# Altium PCB PCB1.PcbDoc
Units mm, origin at the board's own origin, x right, y up, seen from the top; angles counter-clockwise.
Board outline 50.01 x 50 mm, 2 copper layers (Top Layer, Bottom Layer); 45 components, 45 nets, 223 pads, 70 vias.
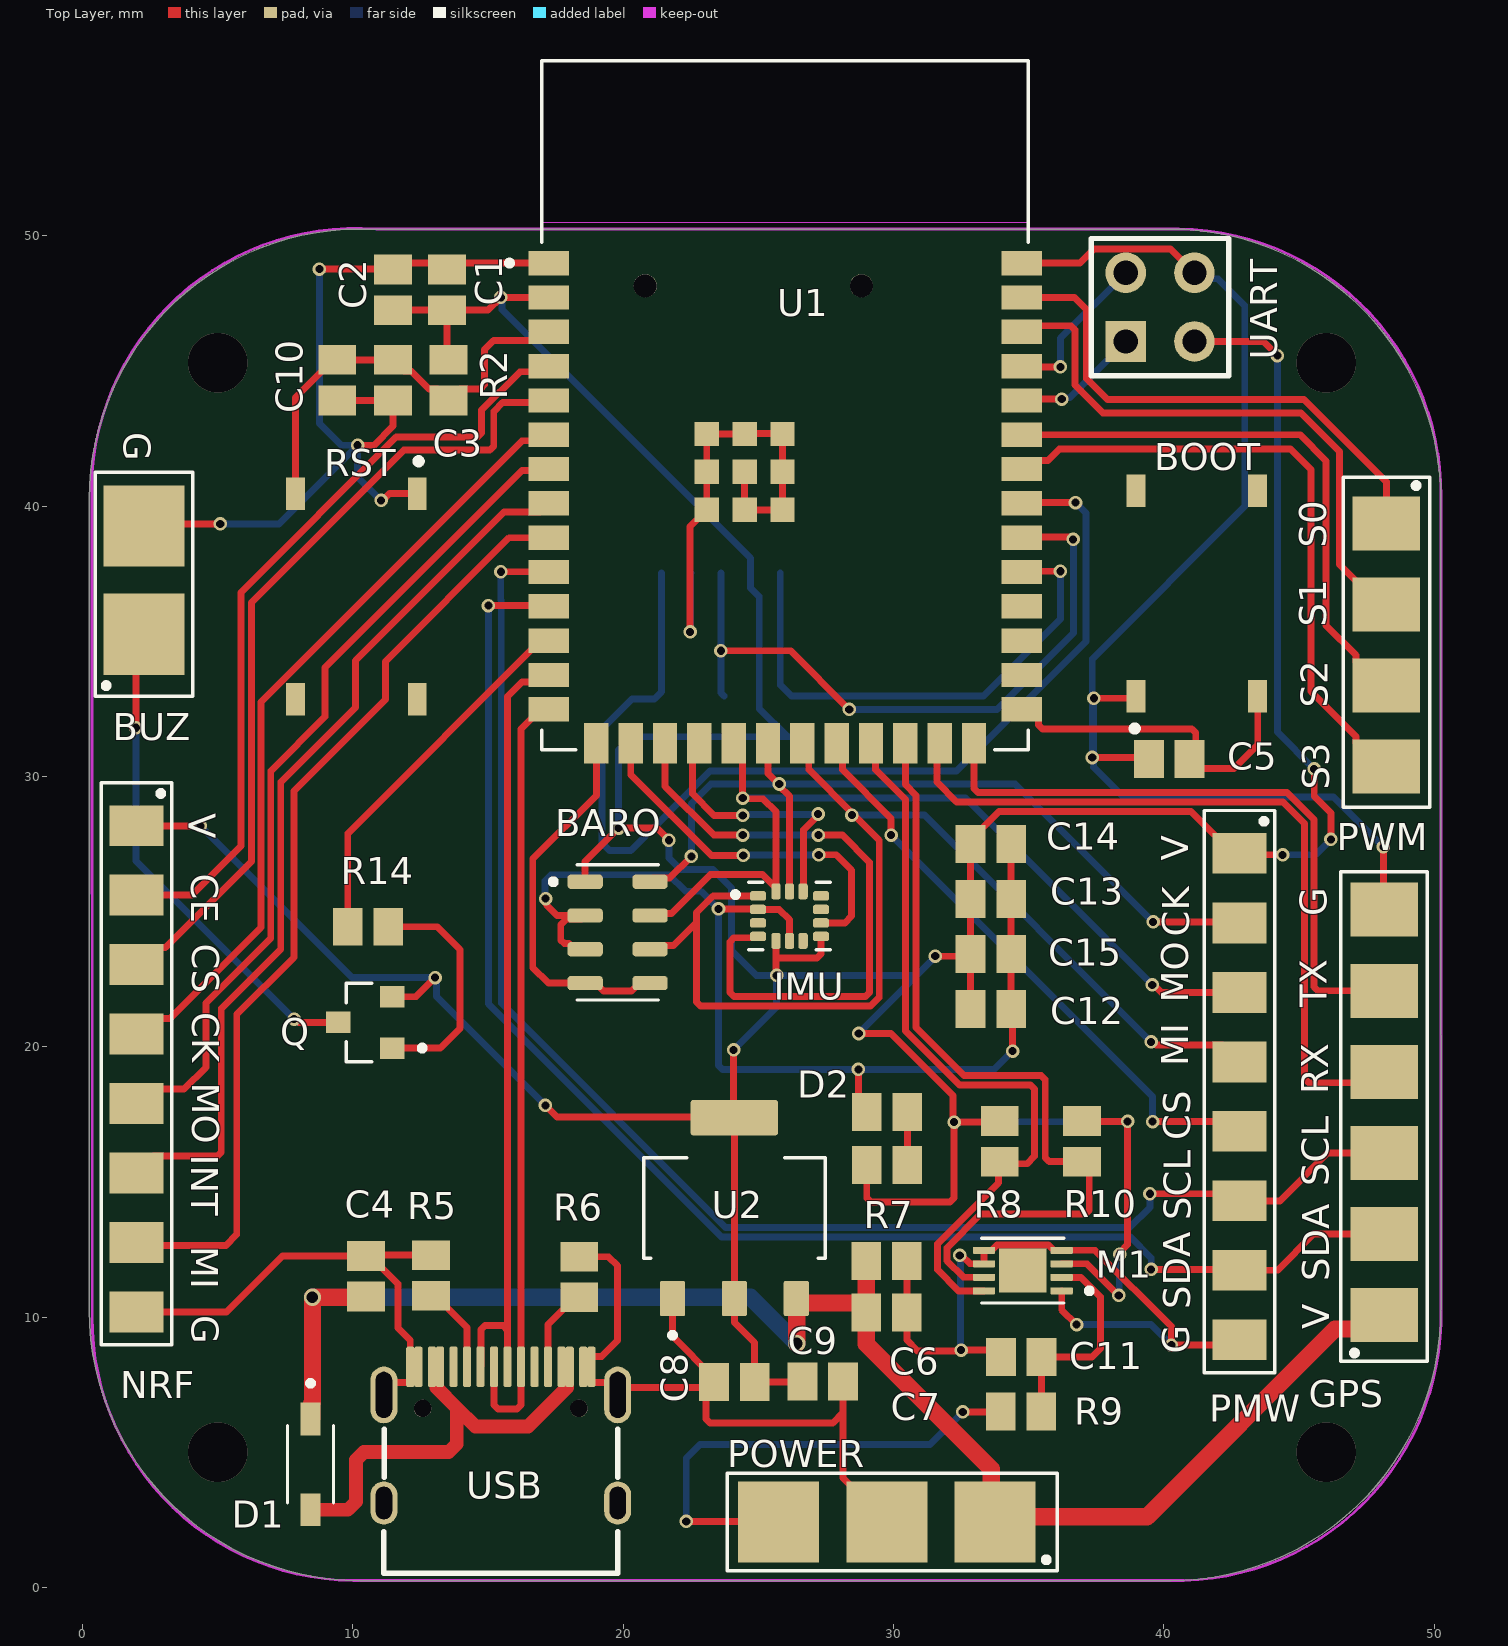
[diagram p0: Top Layer view]
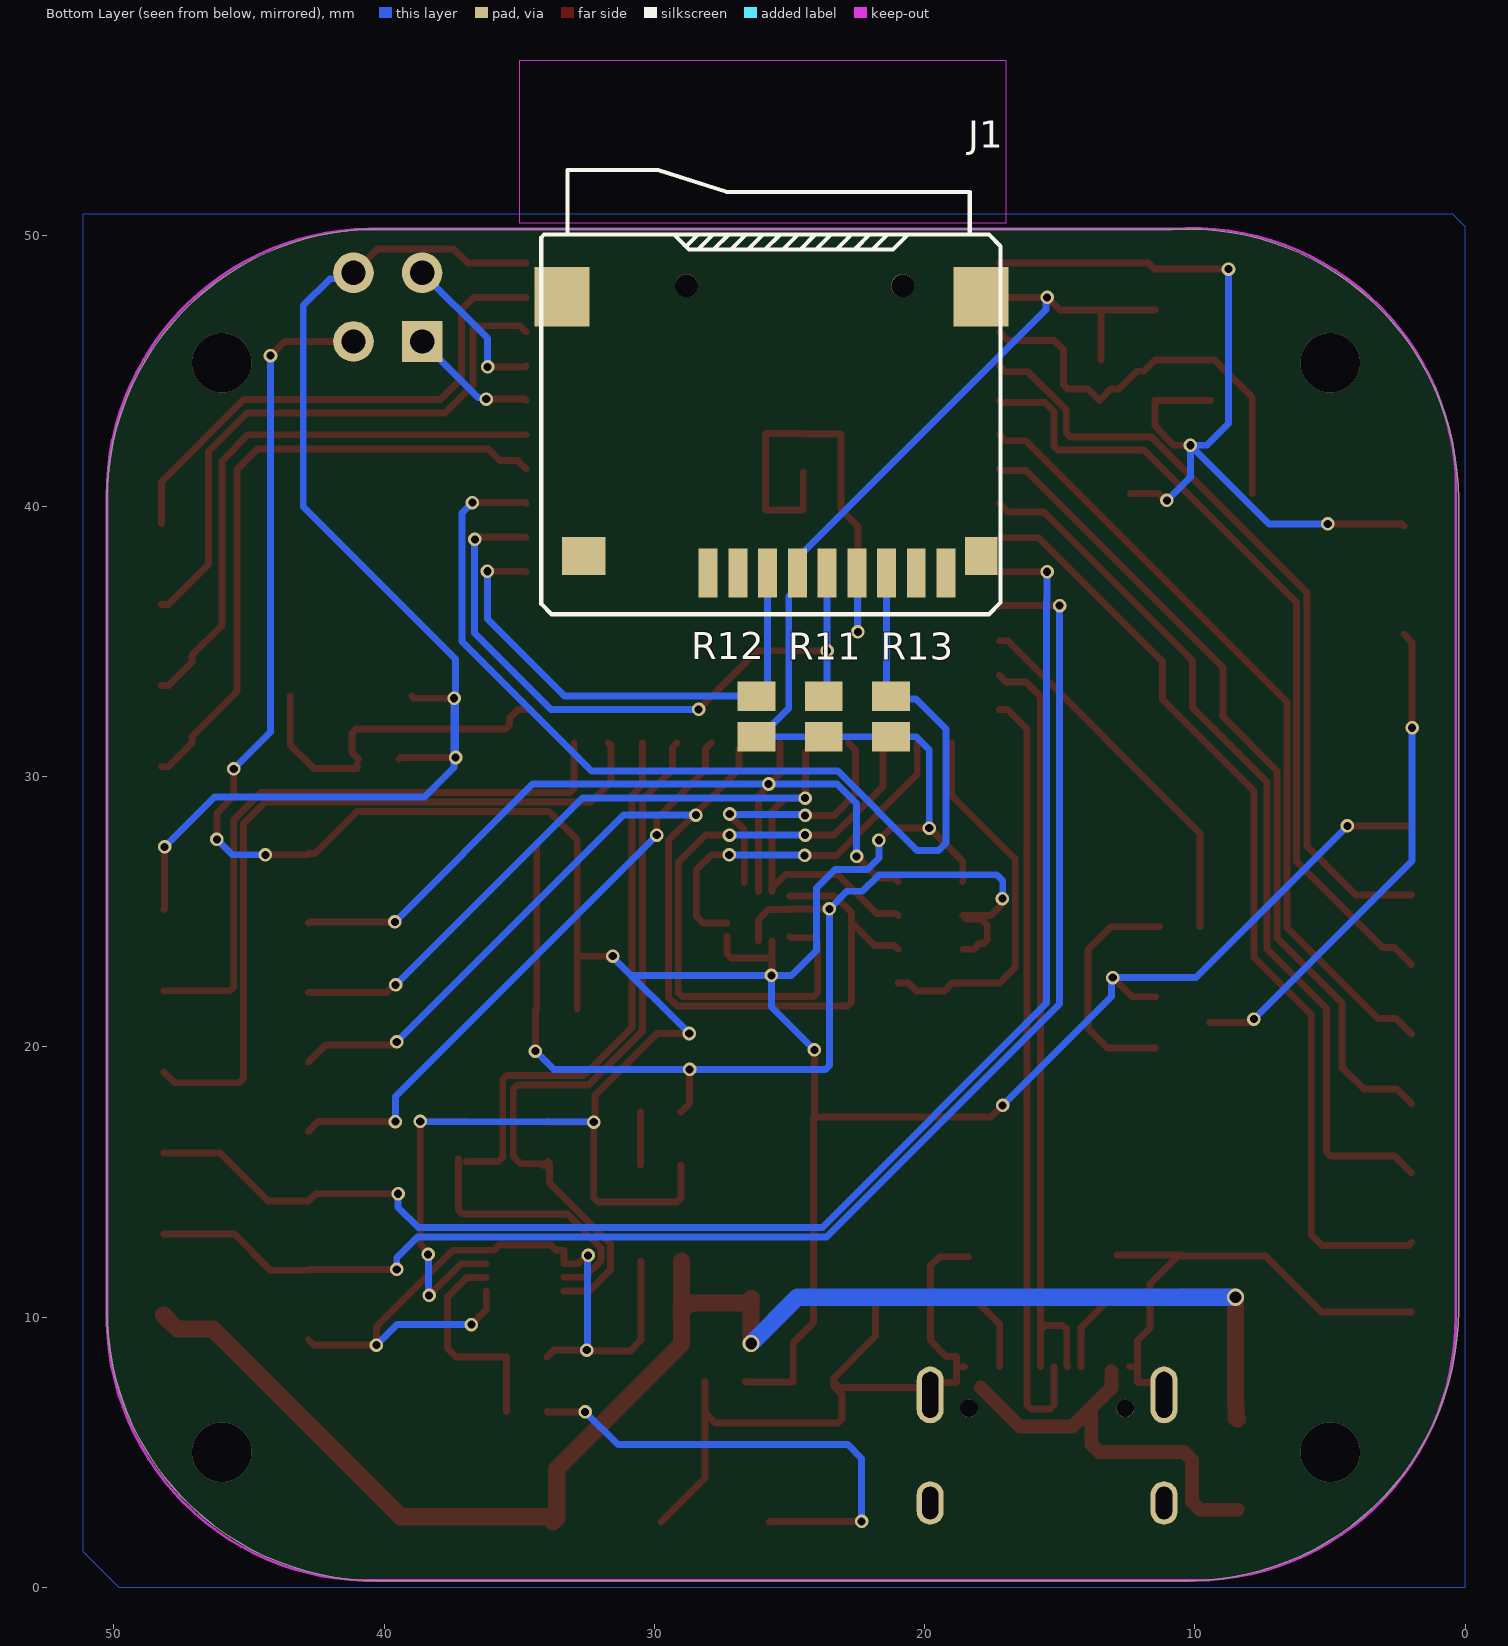
[diagram p1: Bottom Layer view, seen from below]

## Layer stack, top to bottom
Top Solder: solder mask 0.0102, Solder Resist, Dk 3.5
Top Layer: signal copper 0.0356
Dielectric 1: dielectric 0.32, FR-4, Dk 4.8
Bottom Layer: signal copper 0.0356
Bottom Solder: solder mask 0.0102, Solder Resist, Dk 3.5

## Board outline
0.25,10.25 0.25,40.25 cw(c10.25,40.25) 10.25,50.25 40.25,50.25 cw(c40.25,40.25) 50.25,40.25 50.25,20.44 50.26,20.44 50.26,10.252 50.25,10.25 cw(c40.25,10.25) 40.25,0.25 10.25,0.25 cw(c10.25,10.25)

## Design rules (kind name [scope] priority, off if disabled: settings)
Clearance [All] p1: gap=0.1 ignorepadtopadclearanceinfootprint=FALSE except(0.01: Arc-SMDPad Arc-THPad Arc-Hole Track-SMDPad Track-THPad Track-Hole SMDPad-SMDPad SMDPad-THPad)
DiffPairsRouting [All] p1: maxlimit=0.4 minlimit=0.3 mostfreqgap=0.3 toplayer_minwidth=0.381 toplayer_maxwidth=0.381 toplayer_prefwidth=0.381 bottomlayer_minwidth=0.381 bottomlayer_maxwidth=0.381 bottomlayer_prefwidth=0.381 maxuncoupledlength=12.7
MinimumSolderMaskSliver [All] p1: minsoldermaskwidth=0.01
PlaneConnect [All] p1: planeconnectstyle=Relief reliefexpansion=0.508 reliefentries=4 reliefconductorwidth=0.5 reliefairgap=0.5
PolygonConnect [All] p1: connectstyle=Relief reliefconductorwidth=0.5 reliefentries=4 polygonreliefangle="90 Angle" airgapwidth=0.5
RoutingVias [All] p1: holewidth=0.3 width=0.5 viastyle="Through Hole" minholewidth=0.3 minwidth=0.5 maxholewidth=10 maxwidth=0.5
SilkToSilkClearance [All] p1: silktosilkclearance=0
SilkToSolderMaskClearance [IsPad] p1: minsilkscreentomaskgap=0 clearancetoexposedcopper=TRUE
SolderMaskExpansion [IsVia] p1: expansion=0.102 istentingtop=TRUE
Width [All] p1: maxlimit=0.762 minlimit=0.254 preferedwidth=0.254 minimp=50.000000 maximp=50.000000 favimp=50.000000
25 further rules are at their usual default settings.

## Classes and differential pairs
component class Sheet2: AAAA BARO BUZ C12 C13 C14 C15 GPS IMU NRF PMW PWM Q R14 UART
component class Sheet1: AAAA BOOT C1 C2 C3 C4 C5 C6 C7 C8 C9 C10 C11 D1 D2 J1 M1 POWER R2 R5 R6 R7 R8 R9 R10 R11 R12 R13 RST U1 U2 USB

## Components (designator, comment, footprint, x,y, rotation, side; value= is the part's Value field where it differs from the comment)
BARO "MS5611-01BA03" MS5611-SON125P500X300X100-8N 19.79,24.23 r0 top
BOOT "SWITCH6*6*5" SWITCH6*6*5 41.22,36.77 r90 top
BUZ "Buzzer" POWER-2P 2.27,39.26 r90 top
C1 "10uF/25v(20%)" C0805 13.48,48 r270 top
C2 "0.1uF/50V(10%)" C0805 11.48,48 r270 top
C3 "0.1uF/50V(10%)" C0805 11.48,44.66 r90 top value=1uF/16V(10%)
C4 "10uF/25V(20%)" C0805 10.48,11.51 r270 top
C5 "0.1uF/16V(10%)" C0805 40.2,30.65 r0 top
C6 "10uF/25V(20%)" C0805 29.74,12.07 r180 top
C7 "0.1uF/16V(10%)" C0805 29.74,10.17 r180 top
C8 "10uF/25V(20%)" C0805 24.11,7.6 r0 top
C9 "0.1uF/16V(10%)" C0805 27.38,7.62 r180 top
C10 "0.1uF/16V(10%)" C0805 9.42,44.66 r90 top
C11 "1uF/16V(10%)" C0805 34.72,8.52 r180 top
C12 "0.1uF/50V(10%)" C0805 33.6,21.39 r0 top value=10nF
C13 "10uF/25v(20%)" C0805 33.6,25.463 r180 top value=2.2uF
C14 "0.1uF/50V(10%)" C0805 33.6,27.5 r0 top value=0.1uF
C15 "0.1uF/50V(10%)" C0805 33.6,23.427 r0 top value=0.1uF
D1 "1N5819HW-7" SOD3715X145N 8.43,4.55 r270 top
D2 "LED0" C0805 29.76,17.58 r180 top
GPS "Header 6" SIGNAL-6P 48.15,19.07 r90 top
IMU "ICM-42688-P" ICM42688-PQFN50P300X250X97-14N 26.15,24.83 r0 top
J1 "Micro SD" "MICRO SD" 17.91,47.75 r0 bottom
M1 "MAX17040G" MAX17040G+T 34.78,11.72 r180 top
NRF "Header 8" SIGNAL-8P 1.99,20.47 r270 top
PMW "Header 8" SIGNAL-8P 42.8,19.44 r270 top
POWER "Header 3" POWER-3P 29.75,2.42 r180 top
PWM "Header 4" SIGNAL-4P 48.23,30.36 r270 top
Q "S8550" SOT-23_S8550 10.46,20.9 r180 top
R2 "10k(1%)" C0805 13.54,44.66 r90 top
R5 "5.1K" C0805 12.89,11.54 r270 top
R6 "5.1K" C0805 18.37,11.48 r270 top
R7 "5.1K" C0805 29.76,15.63 r0 top
R8 "4.7K(1%)" C0805 33.93,16.5 r90 top
R9 "1K" C0805 34.71,6.5 r0 top
R10 "4.7K(1%)" C0805 36.97,16.5 r90 top
R11 "10k(1%)" C0805 23.735,32.22 r270 bottom
R12 "10k(1%)" C0805 26.22,32.22 r270 bottom
R13 "10k(1%)" C0805 21.25,32.22 r270 bottom
R14 "1K" C0805 10.56,24.44 r0 top
RST "SWITCH6*6*5" SWITCH6*6*5 10.13,36.66 r270 top
U1 "ESP32-S3-WROOM-1" ESP32-S3-WROOM-1-N16R8 25.99,43.73 r0 top
U2 "AMS1117" SOT229P700X180-4N 24.11,14.03 r90 top
UART "Header 4" HDR2X2 38.59,46.09 r0 top
USB "Type-C" TYPE-C-TOP 15.47,5.64 r270 top

## Footprints (in the part's own frame and the unit in brackets; to place one, negate y for a bottom-side part, rotate by r counter-clockwise, add the part's x,y. Pads: shape width x height; smd on the part's side, far side on the other; paste and mask are expansions set on the pad)
C0805 [mm] "Chip Capacitor, Body 2.0x1.3mm, IPC High Density"
  rect 1.1x1.4 smd: 1(-0.75,0) 2(0.75,0)
  body extent -1.1,-0.72 1.1,0.72, height 1.4
ESP32-S3-WROOM-1-N16R8 [mm]
  rect 1.5x0.9 smd: 1(-8.75,5.26) 2(-8.75,3.99) 3(-8.75,2.72) 4(-8.75,1.45) 5(-8.75,0.18) 6(-8.75,-1.09) 7(-8.75,-2.36) 8(-8.75,-3.63) 9(-8.75,-4.9) 10(-8.75,-6.17) 11(-8.75,-7.44) 12(-8.75,-8.71) 13(-8.75,-9.98) 14(-8.75,-11.25) 27(8.75,-11.25) 28(8.75,-9.98) 29(8.75,-8.71) 30(8.75,-7.44) 31(8.75,-6.17) 32(8.75,-4.9) 33(8.75,-3.63) 34(8.75,-2.36) 35(8.75,-1.09) 36(8.75,0.18) 37(8.75,1.45) 38(8.75,2.72) 39(8.75,3.99) 40(8.75,5.26)
  rect 0.9x1.5 smd: 15(-6.985,-12.5) 16(-5.715,-12.5) 17(-4.445,-12.5) 18(-3.175,-12.5) 19(-1.905,-12.5) 20(-0.635,-12.5) 21(0.635,-12.5) 22(1.905,-12.5) 23(3.175,-12.5) 24(4.445,-12.5) 25(5.715,-12.5) 26(6.985,-12.5)
  rect 0.9x0.9 smd: 41_1(-1.5,-2.46) 41_2(-2.9,-2.46) 41_3(-0.1,-2.46) 41_4(-2.9,-3.86) 41_5(-1.5,-3.86) 41_6(-0.1,-3.86) 41_7(-2.9,-1.06) 41_8(-1.5,-1.06) 41_9(-0.1,-1.06)
  Keep-Out Layer region: 9,6.75 -9,6.75 -9,12.75 9,12.75
  Keep-Out Layer region: 9,6.75 -9,6.75 -9,12.75 9,12.75
  silkscreen extent -10.3,-12.75 9,12.75
HDR2X2 [mm] "Connector; Header; 2x2 Position"
  rect 1.5x1.5 hole 0.9: 1(0,0)
  round 1.5 hole 0.9: 2(0,2.54) 3(2.54,0) 4(2.54,2.54)
  silkscreen extent -1.27,-1.27 3.81,3.81
ICM42688-PQFN50P300X250X97-14N [mm]
  rrect50% 0.59x0.35 smd mask+0: 1(-1.165,0.75) 2(-1.165,0.25) 3(-1.165,-0.25) 4(-1.165,-0.75) 8(1.165,-0.75) 9(1.165,-0.25) 10(1.165,0.25) 11(1.165,0.75)
  rrect50% 0.35x0.59 smd mask+0: 5(-0.5,-0.915) 6(0,-0.915) 7(0.5,-0.915) 12(0.5,0.915) 13(0,0.915) 14(-0.5,0.915)
  silkscreen extent -2.1,-1.25 1.5,1.25
MAX17040G+T [mm]
  rrect25% 0.82x0.26 smd: 1(-1.44,0.75) 2(-1.44,0.25) 3(-1.44,-0.25) 4(-1.44,-0.75) 5(1.44,-0.75) 6(1.44,-0.25) 7(1.44,0.25) 8(1.44,0.75)
  rect 1.75x1.63 smd paste-2: 9(0,0)
  silkscreen extent -2.56,-1.2 1.53,1.2
"MICRO SD" [mm]
  rect 2.032x2.2 smd: 0(0,0) 0(15.5,0)
  rect 1.2x1.4 smd: 0(0,9.6)
  round 0.85 hole 0.85 unplated: 0(2.9,-0.4) 0(10.9,-0.4)
  rect 1.6x1.4 smd: 0(14.7,9.6)
  rect 0.7x1.8 smd: 1(10.1,10.227) 2(9,10.227) 3(7.9,10.227) 4(6.8,10.227) 5(5.7,10.227) 6(4.6,10.227) 7(3.5,10.227) 8(2.4,10.227) 9(1.3,10.227)
  silkscreen extent -0.72,-4.68 16.27,11.75, body extent -0.27,-4.63 16,10.57, height 1.8
MS5611-SON125P500X300X100-8N [mm]
  rrect50% 1.31x0.53 smd: 1(-1.2,1.875) 2(-1.2,0.625) 3(-1.2,-0.625) 4(-1.2,-1.875) 5(1.2,-1.875) 6(1.2,-0.625) 7(1.2,0.625) 8(1.2,1.875)
  silkscreen extent -2.48,-2.5 1.5,2.5, body extent -1.5,-2.5 1.5,2.5, height 1.1
POWER-2P [mm]
  rect 3x3 smd: 1(-4,0) 2(0,0)
  silkscreen extent -6.3,-1.8 2,1.8
POWER-3P [mm]
  rect 3x3 smd: 1(-4,0) 2(0,0) 3(4,0)
  silkscreen extent -6.3,-1.8 5.9,1.8
SIGNAL-4P [mm]
  rect 2x2.5 smd: 1(-9,0) 2(-6,0) 3(-3,0) 4(0,0)
  silkscreen extent -10.7,-1.6 1.5,1.6
SIGNAL-6P [mm]
  rect 2x2.5 smd: 1(-9,0) 2(-6,0) 3(-3,0) 4(0,0) 5(3,0) 6(6,0)
  silkscreen extent -10.7,-1.6 7.4,1.6
SIGNAL-8P [mm]
  rect 1.5x2 smd: 1(-7.71,0)
  rect 1.508x2 smd: 2(-5.14,0) 3(-2.57,0) 4(0,0) 5(2.57,0) 6(5.14,0) 7(7.71,0) 8(10.28,0)
  silkscreen extent -9.3,-1.3 11.5,1.3
SOD3715X145N [mm]
  rect 1.21x0.73 smd: A(1.68,0) C(-1.68,0)
  silkscreen extent -3.1,-0.85 1.43,0.85, body extent -1.83,-0.77 1.83,0.77, height 0.8
SOT229P700X180-4N [mm]
  rrect15% 1.31x0.93 smd: 1(-3.345,2.29) 2(-3.345,0) 3(-3.345,-2.29)
  rrect15% 1.31x3.24 smd: 4(3.345,0)
  silkscreen extent -4.8,-3.36 1.86,3.36
SOT-23_S8550 [mm]
  rect 0.9x0.8 smd: 1(-1,0.95) 2(-1,-0.95) 3(1,0)
  silkscreen extent -2.2,-1.45 0.7,1.45, body extent -1.26,-1.45 1.26,1.45, height 1.4
SWITCH6*6*5 [mm]
  rect 1.2x0.7 smd: 1(-3.8,2.25) 2(3.8,2.25) 3(-3.8,-2.25) 4(3.8,-2.25)
  silkscreen extent -5.1,2.2 -4.9,2.4, body extent -3,-3.07 3,2.95, height 4.5
TYPE-C-TOP [mm]
  round 0.65 hole 0.65: 0(-0.98,2.89) 0(-0.98,-2.89)
  oval 1.6x1 hole 0.6 slot 1.2 at 0 deg: 1(2.52,4.325) 2(2.52,-4.325)
  oval 2.1x1 hole 0.6 slot 1.7 at 0 deg: 3(-1.48,-4.325) 4(-1.48,4.325)
  rrect50% 1.5x0.3 smd: A1(-2.52,-3.35) A4(-2.52,-2.55) A5(-2.52,-1.25) A6(-2.52,-0.25) A7(-2.52,0.25) A8(-2.52,1.25) A9(-2.52,2.55) A12(-2.52,3.35) B1(-2.52,3.05) B4(-2.52,2.25) B5(-2.52,1.75) B6(-2.52,0.75) B7(-2.52,-0.75) B8(-2.52,-1.75) B9(-2.52,-2.25) B12(-2.52,-3.05)
  silkscreen extent -0.22,-4.33 5.12,4.33, body extent -2.57,-4.48 5.18,4.48, height 3.26

## Part data
BARO: "Pressure Sensor 0.15PSI ~ 17.4PSI (1kPa ~ 120kPa) Absolute - 24 b 8-SMD", Package="SMD-8 Measurement Specialties", Availability="Not in stock", Check_prices=https://www.snapeda.com/parts/MS5611-01BA03/TE+Connectivity+ALCOSWITCH+Switches/view-part/?ref=eda, MF="TE Connectivity", MP=MS5611-01BA03, Price=None, SnapEDA_Link=https://www.snapeda.com/parts/MS5611-01BA03/TE+Connectivity+ALCOSWITCH+Switches/view-part/?ref=snap
BUZ: library part "Header 2", "Header, 2-Pin", LatestRevisionDate=17-Jul-2002, LatestRevisionNote="Re-released for DXP Platform.", Publisher="Altium Limited"
C1 C2 C3 C4 C5 C6 C7 C8 C9 C10 C11 C12 C13 C14 C15: library part Cap, "Capacitor", LatestRevisionDate=17-Jul-2002, LatestRevisionNote="Re-released for DXP Platform.", PackageDescription="Radial Cap, Thru-Hole; 2 Leads; 0.3 in Pin Spacing", PackageReference=RAD-0.3, Published=8-Jun-2000, Publisher="Altium Limited"
D1: "Diode Schottky 40 V 1A Surface Mount SOD-123", Package="SOD-123 Fairchild Semiconductor", Availability="In Stock", Check_prices=https://www.snapeda.com/parts/1N5819HW-7/Diodes+Inc./view-part/?ref=eda, MF="Diodes Inc.", MP=1N5819HW-7, Price=None, Purchase-URL=https://pricing.snapeda.com/search/part/1N5819HW-7/?ref=eda, SnapEDA_Link=https://www.snapeda.com/parts/1N5819HW-7/Diodes+Inc./view-part/?ref=snap
D2: "Typical INFRARED GaAs LED", LatestRevisionDate=08-Jul-2005, LatestRevisionNote="Mech Layer 1 removed.", PackageDescription="LED; 2 Leads", PackageReference=LED-0, Published=8-Jun-2000, Publisher="Altium Limited"
GPS: "Header, 6-Pin", LatestRevisionDate=17-Jul-2002, LatestRevisionNote="Re-released for DXP Platform.", Publisher="Altium Limited"
IMU: "Accelerometer, Gyroscope, 6 Axis Sensor Output", Package=None, Availability=Unavailable, MP=ICM-42688-P, Price=None
J1: "Micro SD卡", BOM名称="Micro SD卡", 学习资源=www.ooocke.com, 版权归属=源创客
M1: "电量检测"
NRF PMW: "Header, 8-Pin", LatestRevisionDate=17-Jul-2002, LatestRevisionNote="Re-released for DXP Platform.", Publisher="Altium Limited"
POWER: "Header, 3-Pin", LatestRevisionDate=17-Jul-2002, LatestRevisionNote="Re-released for DXP Platform.", Publisher="Altium Limited"
PWM UART: "Header, 4-Pin", LatestRevisionDate=17-Jul-2002, LatestRevisionNote="Re-released for DXP Platform.", Publisher="Altium Limited"
Q: "Bipolar (BJT) Transistor PNP 25 V 500 mA 150MHz 300 mW Surface Mount SOT-23", Package="SOT-23 MDD", Check_prices=https://www.snapeda.com/parts/S8550/MDD/view-part/?ref=eda, MF=MDD, MP=S8550, SnapEDA_Link=https://www.snapeda.com/parts/S8550/MDD/view-part/?ref=snap
R2 R5 R6 R7 R8 R9 R10 R11 R12 R13 R14: library part Res1, "Resistor", LatestRevisionDate=17-Jul-2002, LatestRevisionNote="Re-released for DXP Platform.", PackageDescription="Axial Device, Thru-Hole; 2 Leads; 0.3 in Pin Spacing", PackageReference=AXIAL-0.3, Published=8-Jun-2000, Publisher="Altium Limited"
U1: "Bluetooth, WiFi 802.11b/g/n, Bluetooth v5.0 Transceiver Module 2.4GHz PCB Trace Surface Mount", Package=None, Availability="In Stock", Check_prices=https://www.snapeda.com/parts/ESP32-S3-WROOM-1-N8R8/Espressif+Systems/view-part/?ref=eda, MF="Espressif Systems", MP=ESP32-S3-WROOM-1-N8R8, Price=None, Purchase-URL=https://pricing.snapeda.com/search/part/ESP32-S3-WROOM-1-N8R8/?ref=eda, SnapEDA_Link=https://www.snapeda.com/parts/ESP32-S3-WROOM-1-N8R8/Espressif+Systems/view-part/?ref=snap
U2: "UNO PLUS Arduino R3 Shield, Xbee Arduino IDE Wheeled Robotics Kit", Package="SOT-223 Seeed Technology", Availability=Unavailable, MF="Seeed Technology", MP=AMS1117, Price=None, SnapEDA_Link=https://www.snapeda.com/parts/AMS1117/Seeed%20Technology%20Co.%2C%20Ltd/view-part/184428/?ref=snap
USB: library part USB-Type-C-TOP

## Via types
v1: diameter 0.5, hole 0.3, Top Layer to Bottom Layer, tented both sides, 64 vias
v2: diameter 2.2, hole 2.2, Top Layer to Bottom Layer, tented both sides, 4 vias
v3: diameter 0.635, hole 0.432, Top Layer to Bottom Layer, tented both sides, 2 vias

## Nets (pads, with @x,y where several pads share a name; then routed paths per layer and width w, separated by ;. In a path a pad name is that pad's centre, name@x,y a point inside that pad or via, vN(x,y) a via of type N, cw(c..) or ccw(c..) an arc to the next point about the centre after c; other vN are vias at no path point)
BARO_CS: BARO.4 BARO.5 U1.15 | length 14.1
  Top Layer w0.254: U1.15 19.005,29.295 16.65,26.94 16.65,22.934 17.229,22.355 18.983,22.355 19.27,22.068 20.31,22.068 20.597,22.355 BARO.5
BUZZER: R14.1 U1.12 | length 13.8
  Top Layer w0.254: R14.1 9.81,27.89 16.94,35.02 U1.12
BUZZER_OUT: BUZ.1 Q.3 | length 18.5
  Top Layer w0.254: v1(1.97,31.8) 1.97,34.96 BUZ.1 ; v1(7.82,21.02) 7.887,21.02 8.007,20.9 Q.3
  Bottom Layer w0.254: v1(1.97,31.8) 1.97,26.87 v1(7.82,21.02)
CHIP_PU: C3.2 C10.2 R2.1 RST.3 U1.3 | length 15.9
  Top Layer w0.254: RST.3 7.88,44.02 9.27,45.41 C10.2 C3.2 11.903,44.987 12.163,44.987 12.817,44.333 13.117,44.333 R2.1 13.963,44.333 14.712,44.333 14.87,44.491 14.87,45.79 15.207,46.127 16.917,46.127 U1.3
GND: BARO.2 BARO.3 BOOT.1 BUZ.2 C1.1 C2.1 C3.1 C4.1 C5.1 C6.1 C7.1 C8.1 C9.1 C10.1 C11.2 C12.2 C13.1 C14.2 C15.2 D2.2 GPS.6 IMU.2 IMU.6 J1.6 J1.9 M1.1 M1.4 M1.5 M1.6 NRF.8 PMW.8 POWER.2 R5.1 R6.1 RST.1 U1.1 U1.40 U1.41_1 U1.41_2 U1.41_3 U1.41_4 U1.41_5 U1.41_6 U1.41_7 U1.41_8 U1.41_9 U2.1 UART.4 USB.1 USB.2 USB.3 USB.4 USB.A1 USB.A12 USB.B1 USB.B12 | length 218.3
  Top Layer w0.254: NRF.8 5.32,10.19 7.39,12.26 C4.1 10.63,12.26 11.66,11.23 11.66,9.59 12.12,9.13 USB.A1 ; BUZ.2 2.35,39.34 v1(5.09,39.34) ; v1(8.76,48.77) 11.46,48.77 C2.1 11.72,48.99 U1.1 ; C10.1 C3.1 11.48,42.96 10.77,42.25 v1(10.17,42.25) ; C4.1@10.51,12.29 R5.1 ; v1(11.04,40.21) 11.107,40.21 11.357,40.46 RST.1 ; USB.3 11.145,7.233 11.49,7.577 12.097,7.577 12.12,7.6 USB.A1 ; USB.B12 USB.A1 ; v1(17.127,25.48) 17.157,25.45 17.157,25.252 17.554,24.855 BARO.2 18.455,24.72 17.894,24.72 17.685,24.512 17.685,23.948 17.818,23.815 17.987,23.815 18.197,23.605 BARO.3 ; R6.1 19.46,12.23 19.79,11.9 19.79,9.13 19.202,8.542 18.843,8.542 18.82,8.519 USB.A12 ; USB.B1 USB.A12 ; U2.1 21.82,9.29 23.36,7.75 C8.1 ; v1(22.47,35.35) 22.47,39.25 U1.41_4 U1.41_7 U1.41_8 24.503,42.683 25.172,42.683 ; v1(23.523,25.1) 23.533,25.09 24.975,25.09 IMU.2 25.77,25.08 26.15,24.7 IMU.6 ; U1.41_1 U1.41_5 24.504,39.856 U1.41_6@25.876,39.856 ; U1.41_9@25.876,42.684 25.173,42.684 ; U1.41_6 U1.41_3 U1.41_9 ; C9.1 28.13,6.46 ; v1(28.696,19.16) 28.696,17.894 D2.2 ; POWER.2 28.13,4.04 28.13,6.46 ; C6.1 30.49,9.15 30.89,8.75 32.47,8.75 v1(32.5,8.78) 33.71,8.78 C11.2 ; v1(32.45,12.28) 32.517,12.28 32.824,11.973 33.337,11.973 M1.6 M1.5 33.62,12.47 33.822,12.672 35.738,12.672 35.94,12.47 M1.4 37.46,12.47 40.28,9.65 v1(40.28,8.96) 42.6,8.96 PMW.8 ; C14.2 C13.1 C15.2 C12.2 34.4,21.34 v1(34.4,19.84) ; U1.40 36.897,48.99 37.424,49.517 40.243,49.517 UART.4 ; M1.1 36.22,10.27 v1(36.77,9.72) ; v1(37.35,30.7) 39.4,30.7 C5.1 ; v1(37.41,32.89) 38.89,32.89 BOOT.1 ; v1(48.12,27.39) 48.12,25.1 GPS.6 ; USB.A12 18.82,7.6 18.843,7.577 19.45,7.577 19.795,7.233 USB.4 20.065,7.39 23.15,7.39 C8.1 ; C8.1 23.36,7.424 23.056,7.12 23.056,6.229 23.205,6.08 27.75,6.08 28.13,6.46 ; 25.172,42.683 25.173,42.684
  Bottom Layer w0.254: v1(5.09,39.34) 7.26,39.34 v1(10.17,42.25) ; v1(8.76,48.77) 8.76,43.06 9.57,42.25 v1(10.17,42.25) ; v1(11.04,40.21) 10.17,41.08 v1(10.17,42.25) ; v1(17.127,25.48) 17.11,25.497 17.11,26.14 17.332,26.362 21.687,26.362 22.295,25.755 22.868,25.755 v1(23.523,25.1) 23.523,19.309 23.672,19.16 v1(28.696,19.16) 33.72,19.16 v1(34.4,19.84) ; v1(22.47,35.35) 22.49,35.37 22.49,37.503 J1.6 ; v1(32.45,12.28) 32.475,12.255 32.475,8.805 v1(32.5,8.78) ; v1(36.77,9.72) 39.52,9.72 v1(40.28,8.96) ; v1(37.35,30.7) 37.35,34.34 42.99,39.98 42.99,47.42 42.001,48.409 41.351,48.409 UART.4 ; v1(37.41,32.89) 37.405,32.885 37.405,30.345 37.4,30.34 38.5,29.24 46.27,29.24 v1(48.12,27.39)
GPIO0: BOOT.3 C5.2 U1.27 | length 12.8
  Top Layer w0.254: U1.27 35.04,32.48 35.363,32.157 35.363,31.909 35.512,31.76 41.031,31.76 41.18,31.611 41.18,30.88 C5.2 ; C5.2@41,30.44 41,30.29 42.6,30.29 43.47,31.16 BOOT.3
IMU_CS: IMU.12 U1.18 | length 9.7
  Top Layer w0.254: U1.18 22.56,30.975 22.56,29.36 23.36,28.56 v1(24.42,28.56) ; 26.673,26.066 26.673,28.025 27.21,28.562 v1(27.21,28.61)
  Bottom Layer w0.254: v1(24.42,28.56) 24.445,28.585 27.185,28.585 v1(27.21,28.61)
IMU_INT1: IMU.4 U1.17 | length 23.4
  Top Layer w0.254: U1.17 21.545,29.635 23.35,27.83 v1(24.42,27.83) ; IMU.4 24.937,24.032 24.103,24.032 23.954,23.883 23.954,22.009 24.103,21.86 28.967,21.86 29.116,22.009 29.116,26.824 28.11,27.83 v1(27.22,27.83)
  Bottom Layer w0.254: v1(24.42,27.83) v1(27.22,27.83)
IMU_INT2: IMU.9 U1.16 | length 13.8
  Top Layer w0.254: U1.16 20.275,30.065 23.26,27.08 v1(24.44,27.08) ; v1(27.23,27.1) 27.88,27.1 28.45,26.53 28.45,24.83 28.2,24.58 IMU.9
  Bottom Layer w0.254: v1(24.44,27.08) 24.45,27.09 27.22,27.09 v1(27.23,27.1)
IMU_MISO: BARO.6 IMU.1 PMW.4 U1.21 | length 43.6
  Top Layer w0.254: BARO.6 21.125,23.74 21.86,23.74 22.71,24.59 ; IMU.1 24.55,25.58 23.328,25.58 22.71,24.962 22.71,24.59 ; U1.21 26.862,30.993 26.862,30.248 28.5,28.61 29.47,27.64 29.47,21.828 29.148,21.506 22.859,21.506 22.71,21.655 22.71,24.59 ; v1(39.53,20.18) 39.597,20.18 39.71,20.067 42.173,20.067 PMW.4
  Bottom Layer w0.254: v1(28.46,28.57) 31.14,28.57 v1(39.53,20.18)
IMU_MOSI: BARO.7 IMU.14 PMW.3 U1.19 | length 33.4
  Top Layer w0.254: BARO.7 21.069,24.934 21.784,24.934 23.22,26.37 25.145,26.37 IMU.14@25.65,25.865 ; U1.19 24.408,30.907 24.408,29.212 v1(24.42,29.2) 24.448,29.172 25.178,29.172 25.65,28.7 IMU.14@25.65,25.865 ; IMU.14 IMU.14@25.65,25.865 ; v1(39.57,22.29) 39.637,22.29 39.917,22.01 PMW.3
  Bottom Layer w0.254: v1(24.42,29.2) 32.66,29.2 v1(39.57,22.29)
IMU_SCK: BARO.8 IMU.13 PMW.2 U1.20 | length 32.4
  Top Layer w0.254: BARO.8 21.125,26.24 21.72,26.24 v1(22.52,27.04) ; U1.20 25.355,30.099 25.734,29.72 v1(25.77,29.72) 25.77,29.653 26.15,29.273 IMU.13 ; v1(39.6,24.62) 42.76,24.62 PMW.2
  Bottom Layer w0.254: v1(22.52,27.04) 22.52,29.001 23.239,29.72 34.5,29.72 v1(39.6,24.62)
MAX_SCL: M1.7 R10.1 U1.24 | length 30.4
  Top Layer w0.254: U1.24 30.435,29.695 30.83,29.3 30.83,20.71 32.6,18.94 35.461,18.94 35.61,18.791 35.61,15.899 35.759,15.75 R10.1 ; M1.7 33.337,11.473 32.582,11.473 31.973,12.082 31.973,12.563 33.22,13.81 37.091,13.81 37.24,13.959 R10.1@37.24,15.849
MAX_SDA: M1.8 R8.1 U1.23 | length 27.8
  Top Layer w0.254: U1.23 29.332,31.063 29.332,30.248 30.435,29.145 30.435,20.585 32.434,18.586 35.071,18.586 35.22,18.437 35.22,15.95 34.94,15.67 R8.1@34.084,15.67 ; M1.8 32.4,10.97 31.619,11.751 31.619,12.71 33.877,14.968 33.877,15.697 R8.1 R8.1@34.084,15.596
NetC11_1: C11.1 M1.2 R9.2 | length 8
  Top Layer w0.254: R9.2 35.47,6.51 C11.1 37.34,8.52 37.65,8.83 37.65,10.749 36.932,11.467 36.223,11.467 M1.2
NetD2_1: D2.1 R7.2 | length 1.9
  Top Layer w0.254: R7.2 D2.1
NetQ_1: Q.1 R14.2 | length 8.7
  Top Layer w0.254: R14.2 13.11,24.44 13.96,23.59 13.96,20.68 13.23,19.95 Q.1
NetR5_2: R5.2 USB.A5 | length 3.3
  Top Layer w0.254: R5.2 13.04,10.79 14.22,9.61 USB.A5
NetR6_2: R6.2 USB.B5 | length 3.1
  Top Layer w0.254: USB.B5 17.22,9.73 18.22,10.73 R6.2
NRF24_CE: NRF.2 U1.4 | length 29.4
  Top Layer w0.254: NRF.2 4.05,25.61 5.86,27.42 5.86,36.81 11.6,42.55 14.611,42.55 14.76,42.699 14.76,43.55 16.18,44.97 17.03,44.97 U1.4
NRF24_CSN: NRF.3 U1.5 | length 30.3
  Top Layer w0.254: NRF.3 2.617,23.667 3.057,23.667 6.246,26.856 6.246,36.436 11.88,42.07 15.062,42.07 15.211,42.219 15.211,43.5 15.541,43.83 17.16,43.83 U1.5
NRF24_INT: NRF.6 U1.8 | length 33.3
  Top Layer w0.254: NRF.6 2.617,15.957 4.981,15.957 5.13,16.106 5.13,21.414 7.33,23.614 7.33,29.79 10.09,32.55 10.09,34.28 15.587,39.777 16.917,39.777 U1.8
NRF24_MISO: NRF.7 U1.9 | length 35.3
  Top Layer w0.254: NRF.7 2.1,12.65 5.3,12.65 5.7,13.05 5.7,21.19 7.82,23.31 7.82,29.46 11.2,32.84 11.2,34.25 15.78,38.83 U1.9
NRF24_MOSI: NRF.5 U1.7 | length 31.1
  Top Layer w0.254: NRF.5 2.522,18.432 3.752,18.432 4.56,19.24 4.56,21.62 6.96,24.02 6.96,30.2 8.97,32.21 8.97,34.03 16.258,41.318 17.188,41.318 U1.7
NRF24_SCK: NRF.4 U1.6 | length 29.3
  Top Layer w0.254: NRF.4 2.567,21.047 3.227,21.047 6.6,24.42 6.6,32.76 16.258,42.418 17.018,42.418 U1.6
PMW_CS: PMW.5 U1.22 | length 22.2
  Top Layer w0.254: U1.22 28.112,31.013 28.112,30.248 29.91,28.45 v1(29.91,27.83) ; v1(39.58,17.23) 42.44,17.23 PMW.5
  Bottom Layer w0.254: v1(29.91,27.83) 39.58,18.16 v1(39.58,17.23)
PWM_S0: PWM.1 U1.39 | length 19.4
  Top Layer w0.254: U1.39 36.69,47.72 37.13,47.28 37.13,44.72 37.91,43.94 45.19,43.94 48.23,40.9 PWM.1
PWM_S1: PWM.2 U1.38 | length 21.5
  Top Layer w0.254: U1.38 34.962,46.672 36.561,46.672 36.71,46.523 36.71,44.48 37.74,43.45 45.07,43.45 46.5,42.02 46.5,37.84 47.98,36.36 PWM.2
PWM_S2: PWM.3 U1.35 | length 21
  Top Layer w0.254: U1.35 45.03,42.64 46,41.67 46,35.59 47.107,34.483 47.107,34.233 47.98,33.36 PWM.3
PWM_S3: PWM.4 U1.34 | length 23.6
  Top Layer w0.254: U1.34 35.063,41.693 35.713,41.693 36.13,42.11 44.68,42.11 45.44,41.35 45.44,33.15 47.107,31.483 47.107,31.233 47.98,30.36 PWM.4
RXD0: U1.36 UART.1 | length 4.8
  Top Layer w0.254: U1.36 34.79,43.96 v1(36.22,43.96)
  Bottom Layer w0.254: v1(36.22,43.96) 36.267,44.007 36.507,44.007 UART.1
RXD1: GPS.4 U1.25 | length 28.3
  Top Layer w0.254: U1.25 31.625,31.15 31.6,31.15 31.6,29.79 32.336,29.054 44.406,29.054 45.205,28.255 45.205,18.819 45.354,18.67 47.75,18.67 GPS.4
SCL_EX: GPS.3 PMW.6 U1.10 | length 55.5
  Top Layer w0.254: v1(15.47,37.57) 17.23,37.57 U1.10 ; v1(39.48,14.56) 42.54,14.56 PMW.6 44.29,14.3 46.06,16.07 GPS.3
  Bottom Layer w0.254: v1(15.47,37.57) 15.47,36.535 15.487,36.518 15.487,21.613 23.786,13.314 38.734,13.314 39.48,14.06 v1(39.48,14.56)
SD_CLK: J1.5 R11.1 U1.32 | length 25.1
  Top Layer w0.254: v1(23.61,34.65) 26.19,34.65 v1(28.36,32.48) ; U1.32 34.77,38.86 36.483,38.86 36.573,38.77 v1(36.64,38.77)
  Bottom Layer w0.254: J1.5 v1(23.61,34.65) 23.61,33.095 R11.1 ; v1(28.36,32.48) 33.82,32.48 36.65,35.31 36.65,38.76 v1(36.64,38.77)
SD_CMD: J1.3 R12.1 U1.31 | length 19.1
  Top Layer w0.254: U1.31 34.77,37.59 v1(36.173,37.59)
  Bottom Layer w0.254: J1.3 25.81,33.38 R12.1 33.32,32.97 36.173,35.823 v1(36.173,37.59)
SD_D0: J1.7 R13.1 U1.33 | length 39.9
  Top Layer w0.254: U1.33 34.77,40.13 v1(36.73,40.13)
  Bottom Layer w0.254: J1.7 21.41,33.13 21.148,32.868 20.318,32.868 19.209,31.759 19.209,27.536 19.486,27.259 20.277,27.259 23.215,30.197 32.327,30.197 37.117,34.987 37.117,39.743 v1(36.73,40.13)
SDA_EX: GPS.2 PMW.7 U1.11 | length 55
  Top Layer w0.254: v1(15.01,36.32) 17.21,36.32 U1.11 ; v1(39.53,11.76) 42.77,11.76 PMW.7 44.2,11.73 45.54,13.07 GPS.2
  Bottom Layer w0.254: v1(15.01,36.32) 15.01,21.589 23.639,12.96 38.76,12.96 39.53,12.19 v1(39.53,11.76)
TXD0: U1.37 UART.2 | length 5.9
  Top Layer w0.254: U1.37 34.77,45.15 v1(36.17,45.15)
  Bottom Layer w0.254: v1(36.17,45.15) 36.17,46.21 UART.2
TXD1: GPS.5 U1.26 | length 23.6
  Top Layer w0.254: U1.26 32.975,29.557 33.124,29.408 44.553,29.408 45.559,28.401 45.559,22.219 45.708,22.07 GPS.5
USB_DM: U1.13 USB.A7 USB.B7 | length 29.1
  Top Layer w0.254: USB.B7 14.743,8.183 14.743,9.534 14.892,9.683 15.547,9.683 15.72,9.51 ; USB.A7 15.72,8.77 15.72,9.51 ; U1.13 16.99,33.5 16.26,33.5 15.72,32.96 15.72,9.51
USB_DP: U1.14 USB.A6 USB.B6 | length 28.9
  Top Layer w0.254: USB.A6 15.22,6.749 15.369,6.6 16.071,6.6 16.22,6.749 USB.B6 16.22,31.76 16.94,32.48 U1.14
VBUS: D1.A USB.A4 USB.A9 USB.B4 USB.B9 | length 15.3
  Top Layer w0.508: D1.A 9.812,2.87 10.11,3.168 10.11,4.712 10.408,5.01 13.542,5.01 13.84,5.308 13.84,6.64 ; USB.B9@13.09,7.99 13.09,7.39 13.84,6.64 ; 17.925,7.395 16.48,5.95 14.53,5.95 13.84,6.64
VCC3.3: BARO.1 C1.2 C2.2 C8.2 C9.2 C12.1 C13.2 C14.1 C15.1 IMU.5 IMU.8 J1.4 M1.3 NRF.1 PMW.1 Q.2 R2.2 R7.1 R8.2 R10.2 R11.2 R12.2 R13.2 U1.2 U2.2 U2.4 UART.3 | length 185.8
  Top Layer w0.254: NRF.1 2,28.17 v1(4.36,28.17) ; Q.2 12.33,21.85 v1(13.04,22.56) ; C2.2 C1.2 ; R2.2@13.48,45.41 C1.2 ; v1(17.12,17.83) 17.545,17.405 U2.4@24.08,17.405 ; U1.2 v1(15.47,47.72) 15,47.25 C1.2 ; BARO.1 18.59,26.85 v1(19.83,28.09) 21.24,28.09 v1(21.69,27.64) ; v1(24.08,19.88) U2.4@24.08,17.405 ; IMU.5 25.65,23.287 ; v1(25.67,22.64) 25.65,22.66 25.65,23.287 ; C9.2 26.61,7.6 C8.2 24.86,9.05 24.112,9.798 24.112,10.683 U2.2 U2.4 U2.4@24.08,17.405 ; IMU.8 27.315,23.436 27.166,23.287 25.65,23.287 ; v1(28.71,20.49) 29.9,20.49 32.193,18.197 32.193,17.257 v1(32.24,17.21) ; R7.1 29.01,14.402 29.159,14.253 32.091,14.253 32.24,14.402 v1(32.24,17.21) ; v1(31.54,23.35) 32.773,23.35 C15.1 ; C12.1 C15.1 ; R8.2 33.89,17.21 v1(32.24,17.21) ; M1.3 37.16,11.97 v1(38.33,10.8) ; R10.2 36.98,17.24 v1(38.66,17.24) 38.66,12.677 38.37,12.387 v1(38.37,12.32) ; UART.3 43.68,46.09 v1(44.2,45.57) ; v1(44.39,27.1) 42.85,27.1 PMW.1 42.55,27.15 41,28.7 33.9,28.7 32.85,27.65 C14.1 C13.2 C15.1 ; v1(45.56,30.28) 45.56,29.27 46.18,28.65 v1(46.18,27.67)
  Bottom Layer w0.254: v1(4.36,28.17) 9.97,22.56 v1(13.04,22.56) 13.087,22.513 13.087,21.863 v1(17.12,17.83) ; v1(15.47,47.72) 15.517,47.673 15.517,47.266 24.71,38.073 J1.4 24.71,36.973 25.03,36.653 25.03,32.51 R12.2@26.07,31.47 ; v1(19.83,28.09) 19.83,30.98 20.318,31.468 21.248,31.468 R13.2 R11.2 R12.2@26.07,31.47 ; v1(21.69,27.64) 21.69,26.98 22.118,26.552 23.319,26.552 24,25.871 24,23.56 24.92,22.64 v1(25.67,22.64) ; v1(24.08,19.88) 25.67,21.47 v1(25.67,22.64) ; R12.2 R12.2@26.07,31.47 ; v1@28.721,20.501 31.54,23.32 v1(31.54,23.35) ; 30.83,22.64 v1(25.67,22.64) ; v1(32.24,17.21) 32.255,17.225 38.645,17.225 v1(38.66,17.24) ; v1(38.33,10.8) 38.35,10.82 38.35,12.3 v1(38.37,12.32) ; v1(44.2,45.57) 44.2,31.64 v1(45.56,30.28) ; v1(44.39,27.1) 45.61,27.1 v1(46.18,27.67)
VCC5: C4.2 C6.2 C7.2 D1.C GPS.1 POWER.1 U2.3 | length 58.8
  Top Layer w0.635: D1.C 8.478,6.278 8.478,6.798 8.5,6.821 v3(8.5,10.73) 10.45,10.73 C4.2 ; U2.3 26.565,10.52 28.69,10.52 28.84,10.37 C7.2@28.99,10.22 ; v3(26.42,9.02) U2.3@26.42,10.665 ; C6.2 28.99,10.37 C7.2 ; C7.2@29.015,10.195 C7.2 ; GPS.1 47.641,9.561 46.331,9.561 39.38,2.61 33.94,2.61 POWER.1 33.613,2.557 33.613,4.377 28.99,9 C7.2
  Bottom Layer w0.635: v3(8.5,10.73) 24.71,10.73 v3(26.42,9.02)
VREF: POWER.3 R9.1 | length 18.1
  Top Layer w0.254: v1(22.33,2.44) 25.73,2.44 POWER.3 ; v1(32.56,6.49) 33.95,6.49 R9.1
  Bottom Layer w0.254: v1(22.33,2.44) 22.33,4.77 22.84,5.28 31.35,5.28 v1(32.56,6.49)
pads on no net: BOOT.2 BOOT.4 IMU.3 IMU.7 IMU.10 IMU.11 J1.0 J1.1 J1.2 J1.8 M1.9 RST.2 RST.4 U1.28 U1.29 U1.30 USB.0 USB.A8 USB.B8
copper on no net:
  other v2: 5,5 46,5 5,45.3 46,45.3

## Polygon pours and split planes (outlines as drawn)
GND on Bottom Layer "NONET_L02_P000" (solid, shelved, pour order 0): 0,50.33 0.47,50.8 51.15,50.8 51.15,1.34 49.81,0 0,0

## Keep-outs
Keep-Out Layer:
  lines w0.1: 50.25,20.4 50.25,40.32 ; 50.25,40.35 ccw(c40.45,40.45) 40.55,50.25 10.85,50.25 ccw(c10.1,40.5) 0.35,41.25 0.351,10.015 ccw(c10.062,9.962) 10.009,0.251 40.74,0.25 ccw(c40.476,10.026) 50.251,10.29 50.251,20.4

## Silkscreen, mask and mechanical layers (free items; w line width, h text height)
Top Overlay:
  text "G" at 1.524,42.736 h1 r270
  text "S0" at 46.006,38.454 h1 r90
  text "S1" at 46.006,35.544 h1 r90
  text "S2" at 46.066,32.534 h1 r90
  text "S3" at 46.126,29.514 h1 r90
  text "V" at 3.924,28.636 h1 r270
  text "V" at 40.906,26.874 h1 r90
  text "CE" at 4.014,26.406 h1 r270
  text "G" at 46.016,24.834 h1 r90
  text "CK" at 40.936,24.074 h1 r90
  text "CS" at 4.054,23.816 h1 r270
  text "MO" at 40.906,21.634 h1 r90
  text "TX" at 46.016,21.464 h1 r90
  text "CK" at 4.054,21.276 h1 r270
  text "MI" at 40.906,19.284 h1 r90
  text "MO" at 4.064,18.676 h1 r270
  text "RX" at 46.076,18.244 h1 r90
  text "CS" at 40.966,16.544 h1 r90
  text "INT" at 4.024,15.996 h1 r270
  text "SCL" at 46.096,14.844 h1 r90
  text "SCL" at 40.996,13.584 h1 r90
  text "MI" at 4.024,12.626 h1 r270
  text "SDA" at 46.126,11.324 h1 r90
  text "SDA" at 40.966,10.284 h1 r90
  text "G" at 4.034,10.066 h1 r270
  text "V" at 46.126,9.544 h1 r90
  text "G" at 40.936,8.644 h1 r90
Mechanical 1:
  lines w0.254: 0.27,10.127 0.271,40.457 cw(c10.16,40.44) 10.177,50.329 40.397,50.339 cw(c40.38,40.45) 50.269,40.433 ; 0.281,10.127 ccw(c10.17,10.11) 10.153,0.221 ; 9.35,0.23 40.9,0.231 ccw(c40.916,9.497) 50.182,9.481 50.27,40.433

## Text inside footprints (layer, text, board x,y; h text height)
U1: Mechanical 13 "ANTENNA" at 21.49,53.23 h1.27